# Altium PCB AIMLAB_TESTSTATION_ADC_V1.PcbDoc (part 4 of 4)
Units mm, origin at the board's own origin, x right, y up, seen from the top; angles counter-clockwise.
Board outline 175.7 x 83.5 mm, 6 copper layers (Top Layer, MidLayer1, MidLayer2, MidLayer3, MidLayer4, Bottom Layer), stack 1.507 mm thick; 326 components, 348 nets, 1330 pads, 153 vias.
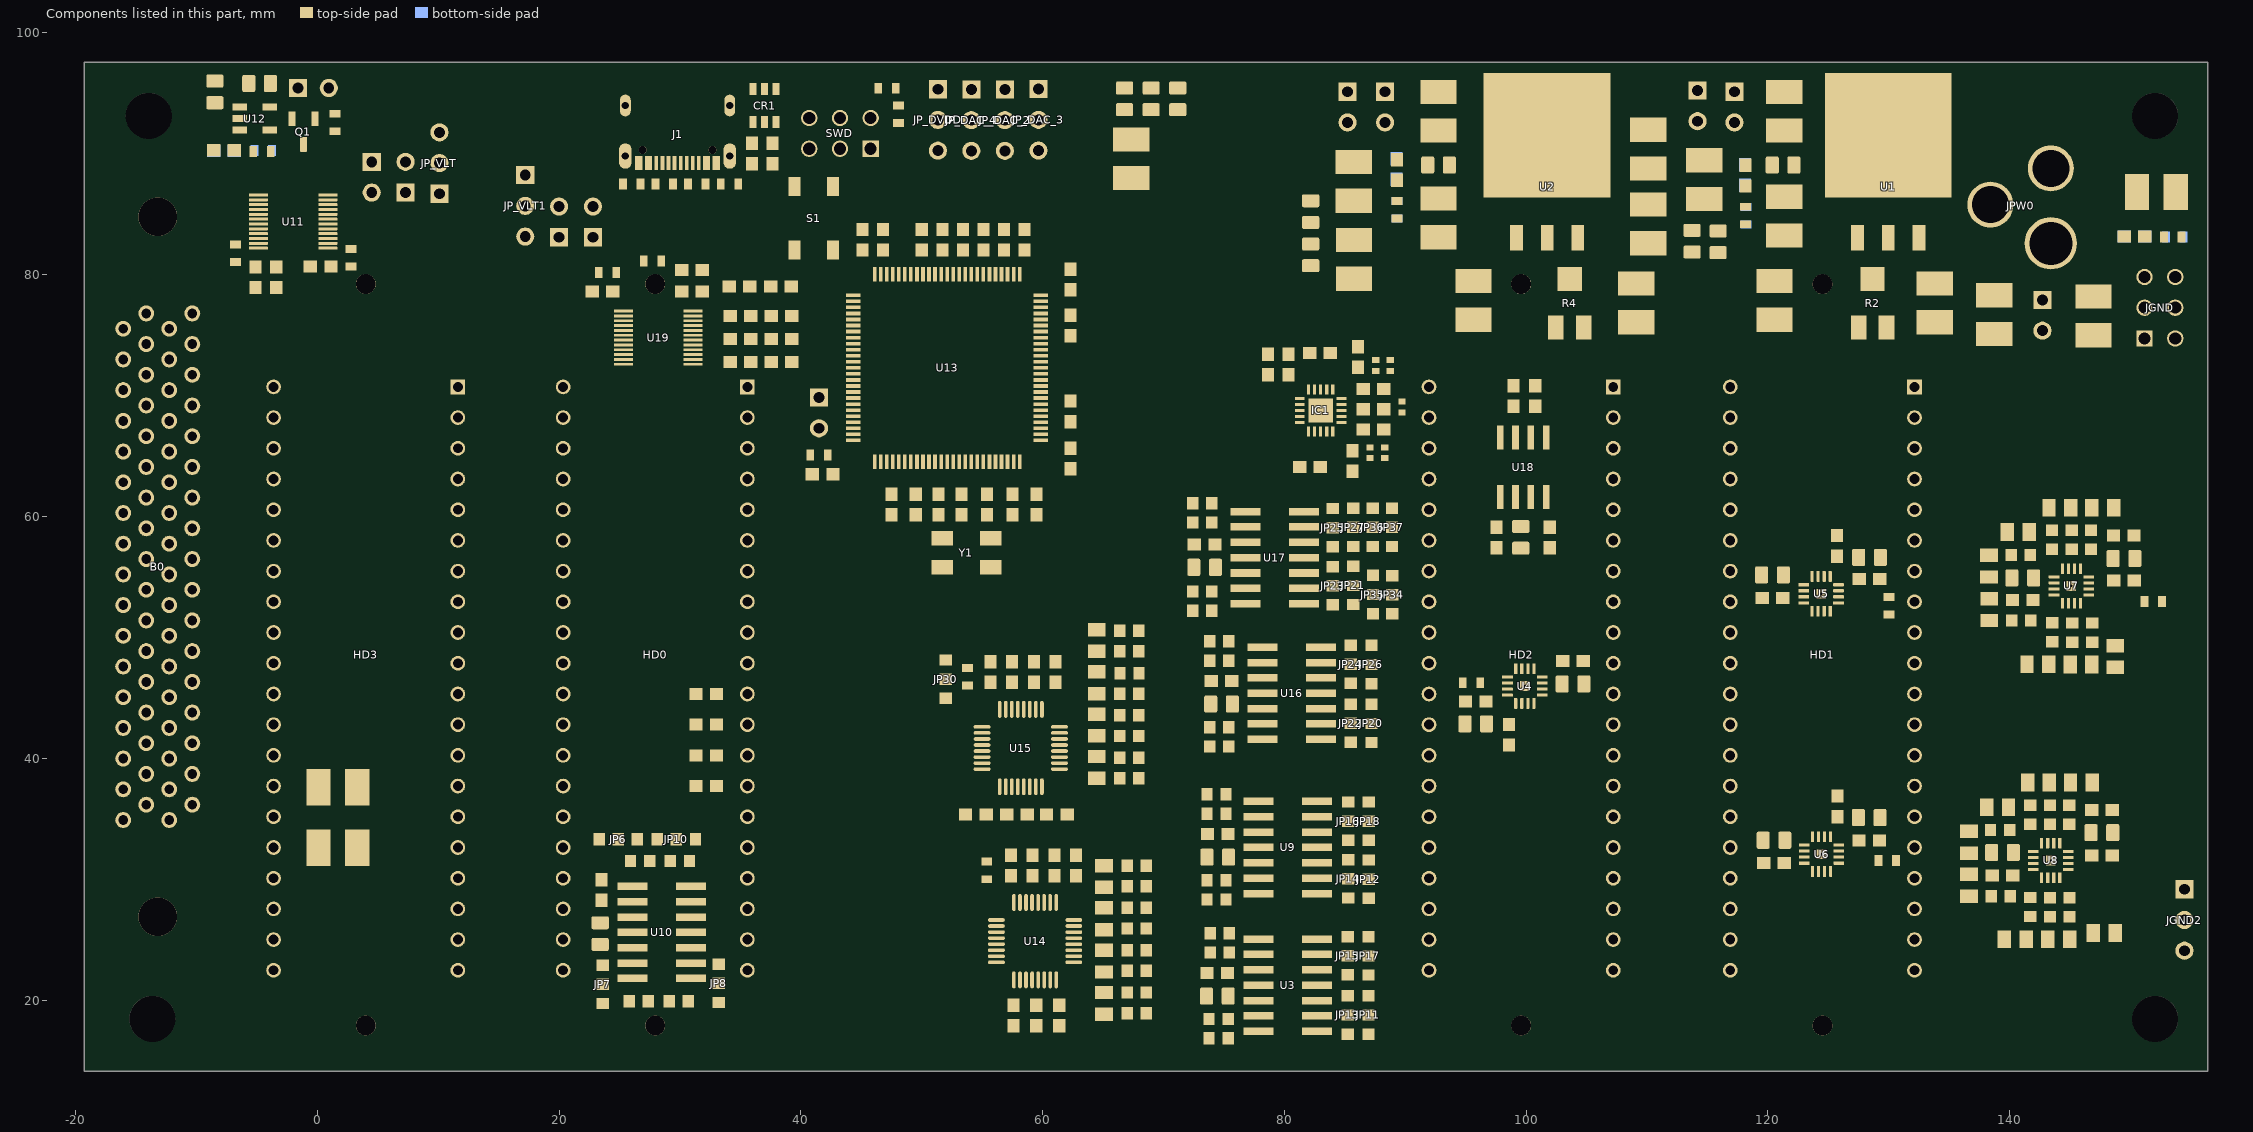
[diagram p8: the components of this part, seen from the top]

## Silkscreen, mask and mechanical layers (free items; w line width, h text height) (continued)
Bottom Overlay:
  text "1.8V        3V" at 10.571,96.621 h1 r90
  text "SWD" at 46.65,94.85 h1.5
  text "1.8V" at 1.425,92.1 h1.5
  text "5V        1.8V" at 17.571,91.646 h1 r90
  text "3.3V" at 88.225,89.325 h1.5
  text "5V" at 117.225,89.2 h1.5
  text "3V" at 20.646,89.096 h1 r90
  text "5V" at 7.971,84.996 h1 r90
  text "DVDD" at 50.608,83.05 h1.5 r270
  text "CSN" at 53.375,83.05 h1.5 r270
  text "SCK" at 56.15,83.05 h1.5 r270
  text "SDI" at 58.925,83.05 h1.5 r270
  text "JGND" at 149.675,80.125 h1.5 r90
  text "USB_5V" at 34.28,70.277 h1.02
  text "1.8V" at 26.78,70.252 h1.02
  text "PFI15" at 2.3,70.207 h1.02
  text "DIO7" at 9.561,70.107 h1.02
  text "DVDD" at 34.28,67.737 h1.02
  text "DVDD_3V" at 28.075,67.725 h1.02
  text "PFI14" at 2.3,67.667 h1.02
  text "AGND" at 97,67.625 h1
  text "DIO6" at 9.561,67.567 h1.02
  text "M_DIO7" at 26.78,65.172 h1.02
  text "DGND" at 34.28,65.172 h1.02
  text "AGND" at 121.5,65.15 h1.02
  text "AGND" at 130.375,65.15 h1.02
  text "PFI13" at 2.3,65.127 h1.02
  text "DIO5" at 9.561,65.027 h1.02
  text "M_DIO8" at 34.28,62.657 h1.02
  text "M_DIO6" at 26.78,62.632 h1.02
  text "AVDD" at 105.8,62.625 h1.02
  text "PFI12" at 2.3,62.587 h1.02
  text "2_1" at 121.5,62.55 h1.02
  text "4_1" at 130.375,62.55 h1.02
  text "DIO4" at 9.561,62.487 h1.02
  text "M_DIO9" at 34.28,60.117 h1.02
  text "M_DIO5" at 26.78,60.092 h1.02
  text "PFI11" at 2.3,60.047 h1.02
  text "Current1" at 100,60.025 h1.02
  text "AVDD3" at 105.8,60.025 h1.02
  text "2_2" at 121.5,59.975 h1
  text "4_2" at 130.375,59.975 h1
  text "DIO3" at 9.561,59.947 h1.02
  text "M_DIO12" at 34.28,57.577 h1.02
  text "M_DIO4" at 26.78,57.552 h1.02
  text "Current2" at 100,57.525 h1.02
  text "REF" at 105.8,57.525 h1.02
  text "PFI10" at 2.3,57.507 h1.02
  text "2_3" at 121.5,57.475 h1
  text "4_3" at 130.375,57.475 h1
  text "DIO2" at 9.561,57.407 h1.02
  text "M_DIO13" at 34.28,55.037 h1.02
  text "M_DIO3" at 26.78,55.012 h1.02
  text "AGND" at 97,55.025 h1.02
  text "DAC_1_8" at 105.8,55.025 h1.02
  text "PFI9" at 2.3,54.967 h1.02
  text "DIO1" at 9.561,54.867 h1.02
  text "2_4" at 121.5,54.875 h1
  text "4_4" at 130.375,54.875 h1
  text "M_DIO14" at 34.28,52.497 h1.02
  text "M_DIO2" at 26.78,52.472 h1.02
  text "PFI8" at 2.3,52.427 h1.02
  text "AGND" at 97,52.425 h1.02
  text "1_7" at 105.8,52.425 h1.02
  text "DIO0" at 9.561,52.327 h1.02
  text "2_5" at 121.5,52.275 h1
  text "4_5" at 130.375,52.275 h1
  text "M_DIO15" at 34.23,50.047 h1.02
  text "M_DIO1" at 26.78,49.932 h1.02
  text "8N" at 97,49.925 h1.02
  text "1_6" at 105.8,49.925 h1.02
  text "PFI7" at 2.3,49.887 h1.02
  text "PFI3" at 9.561,49.787 h1.02
  text "2_6" at 121.5,49.775 h1
  text "4_6" at 130.375,49.775 h1
  text "M_DIO0" at 26.78,47.392 h1.02
  text "PFI6" at 2.3,47.347 h1.02
  text "8P" at 97,47.325 h1.02
  text "1_5" at 105.8,47.325 h1.02
  text "PFI2" at 9.561,47.247 h1.02
  text "2_7" at 121.5,47.175 h1
  text "4_7" at 130.375,47.175 h1
  text "MCU_ADC1" at 34.28,44.9 h1.02
  text "7P" at 97,44.825 h1.02
  text "1_4" at 105.8,44.825 h1.02
  text "PFI5" at 2.3,44.807 h1.02
  text "PFI1" at 9.561,44.707 h1.02
  text "2_8" at 121.5,44.675 h1
  text "4_8" at 130.375,44.675 h1
  text "AGND" at 25.23,42.387 h1.02
  text "7N" at 97,42.325 h1.02
  text "1_3" at 105.8,42.325 h1.02
  text "M_ADC2" at 34.28,42.287 h1.02
  text "PFI4" at 2.3,42.267 h1.02
  text "PFI0" at 9.561,42.167 h1.02
  text "AGND" at 121.5,42.175 h1.02
  text "AGND" at 130.375,42.175 h1.02
  text "3_1" at 121.5,39.875 h1
  text "5_1" at 130.375,39.875 h1
  text "AGND" at 25.23,39.847 h1.02
  text "M_ADC3" at 34.28,39.747 h1.02
  text "6N" at 97,39.725 h1.02
  text "1_2" at 105.8,39.725 h1.02
  text "DAQ_DGND0" at 8.4,39.575 h1.02
  text "3_2" at 121.5,37.375 h1
  text "5_2" at 130.375,37.375 h1
  text "AGND" at 25.23,37.307 h1.02
  text "6P" at 97,37.225 h1.02
  text "1_1" at 105.8,37.225 h1.02
  text "M_ADC4" at 34.28,37.207 h1.02
  text "AOGND0" at 3.275,37.15 h1.02
  text "DAQ_5V" at 10.575,37.15 h1.02
  text "AIGND0" at 34.675,34.775 h1.02
  text "3_3" at 121.5,34.775 h1
  text "5_3" at 130.375,34.775 h1
  text "AISENSE0" at 28.5,34.7 h1.02
  text "5N" at 97,34.625 h1.02
  text "AGND" at 105.8,34.625 h1.02
  text "AO1" at 9.561,34.547 h1.02
  text "AO0" at 2.3,34.525 h1.02
  text "3_4" at 121.5,32.175 h1
  text "5_4" at 130.375,32.175 h1
  text "AI7" at 24.08,32.127 h1.02
  text "AI6" at 34.28,32.127 h1.02
  text "5P" at 97,32.125 h1.02
  text "AGND" at 105.8,32.125 h1.02
  text "AIGND0" at 3.275,32.025 h1.02
  text "AIGND0" at 10.575,32.025 h1.02
  text "JGND" at 152.6,29.9 h1.5 r90
  text "3_5" at 121.5,29.675 h1
  text "5_5" at 130.375,29.675 h1
  text "4P" at 97,29.625 h1.02
  text "4N" at 105.8,29.625 h1.02
  text "AI5" at 24.08,29.587 h1.02
  text "AI4" at 34.28,29.587 h1.02
  text "AI15" at 9.561,29.467 h1.02
  text "AI14" at 2.3,29.15 h1.02
  text "3_6" at 121.5,27.075 h1
  text "5_6" at 130.375,27.075 h1
  text "DAQ_AIGND0" at 34.28,27.05 h1.02
  text "AI12" at 2.3,27.027 h1.02
  text "3P" at 97,27.025 h1.02
  text "3N" at 105.8,27.025 h1.02
  text "AI13" at 9.561,26.927 h1.02
  text "3_7" at 121.5,24.575 h1
  text "5_7" at 130.375,24.575 h1
  text "AI0" at 24.08,24.507 h1.02
  text "AI3" at 34.28,24.507 h1.02
  text "AI10" at 2.3,24.487 h1.02
  text "2P" at 97,24.425 h1.02
  text "2N" at 105.8,24.425 h1.02
  text "AI11" at 9.561,24.387 h1.02
  text "DAQ_AI1" at 27.75,22.1 h1.02
  text "3_8" at 121.5,22.075 h1.02
  text "5_8" at 130.375,22.075 h1.02
  text "AI2" at 34.28,21.967 h1.02
  text "AI8" at 2.3,21.947 h1.02
  text "1P" at 97,21.925 h1.02
  text "ADC_1N" at 105.8,21.925 h1.02
  text "AI9" at 9.561,21.847 h1.02
Mechanical 1:
  lines w0.178: 138.828,81.695 138.828,96.554 147.972,96.554 147.972,81.695

## Text inside footprints (layer, text, board x,y; h text height)
B0: Top Overlay "A1" at -10.977,79.904 h1.27 r270; Top Overlay "B1" at -14.787,79.904 h1.27 r270; Top Overlay "A34" at -12.882,33.32 h1.27 r270; Top Overlay "B34" at -16.692,33.32 h1.27 r270; Mechanical 13 "A1" at -10.977,79.904 h1.27 r270; Mechanical 13 "B1" at -14.787,79.904 h1.27 r270; Mechanical 13 "A34" at -12.882,33.32 h1.27 r270; Mechanical 13 "B34" at -16.692,33.32 h1.27 r270; Mechanical 13 "RefDes2" at -14.787,58.073 h1.27 r270; Bottom Overlay "A1" at -10.977,78.634 h1.27 r270; Bottom Overlay "B1" at -14.787,78.634 h1.27 r270; Bottom Overlay "A34" at -12.882,31.415 h1.27 r270; Bottom Overlay "B34" at -16.692,31.415 h1.27 r270
CR1: Top Overlay "*" at 38.382,95.937 h1.27 r270; Mechanical 13 "*" at 37.178,94.813 h1.27 r270
HD0: Bottom Overlay "356mils row" at 35.829,72.655 h1
HD1: Bottom Overlay "356mils row" at 132.379,72.655 h1
HD2: Bottom Overlay "356mils row" at 107.454,72.655 h1
HD3: Bottom Overlay "356mils row" at 11.879,72.655 h1
IC1: Top Overlay "*" at 79.914,69.388 h1.27; Mechanical 13 "*" at 81.362,69.388 h1.27
U18: Top Overlay "*" at 102.087,67.11 h1.27 r270; Mechanical 13 "*" at 100.906,66.005 h1.27 r270